# Altium PCB nguon.PcbDoc
Units mil, origin at the board's own origin, x right, y up, seen from the top; angles counter-clockwise.
Board outline 7517 x 10839 mil, 2 copper layers (Top Layer, Bottom Layer); 74 components, 22 nets, 172 pads, 8 vias.
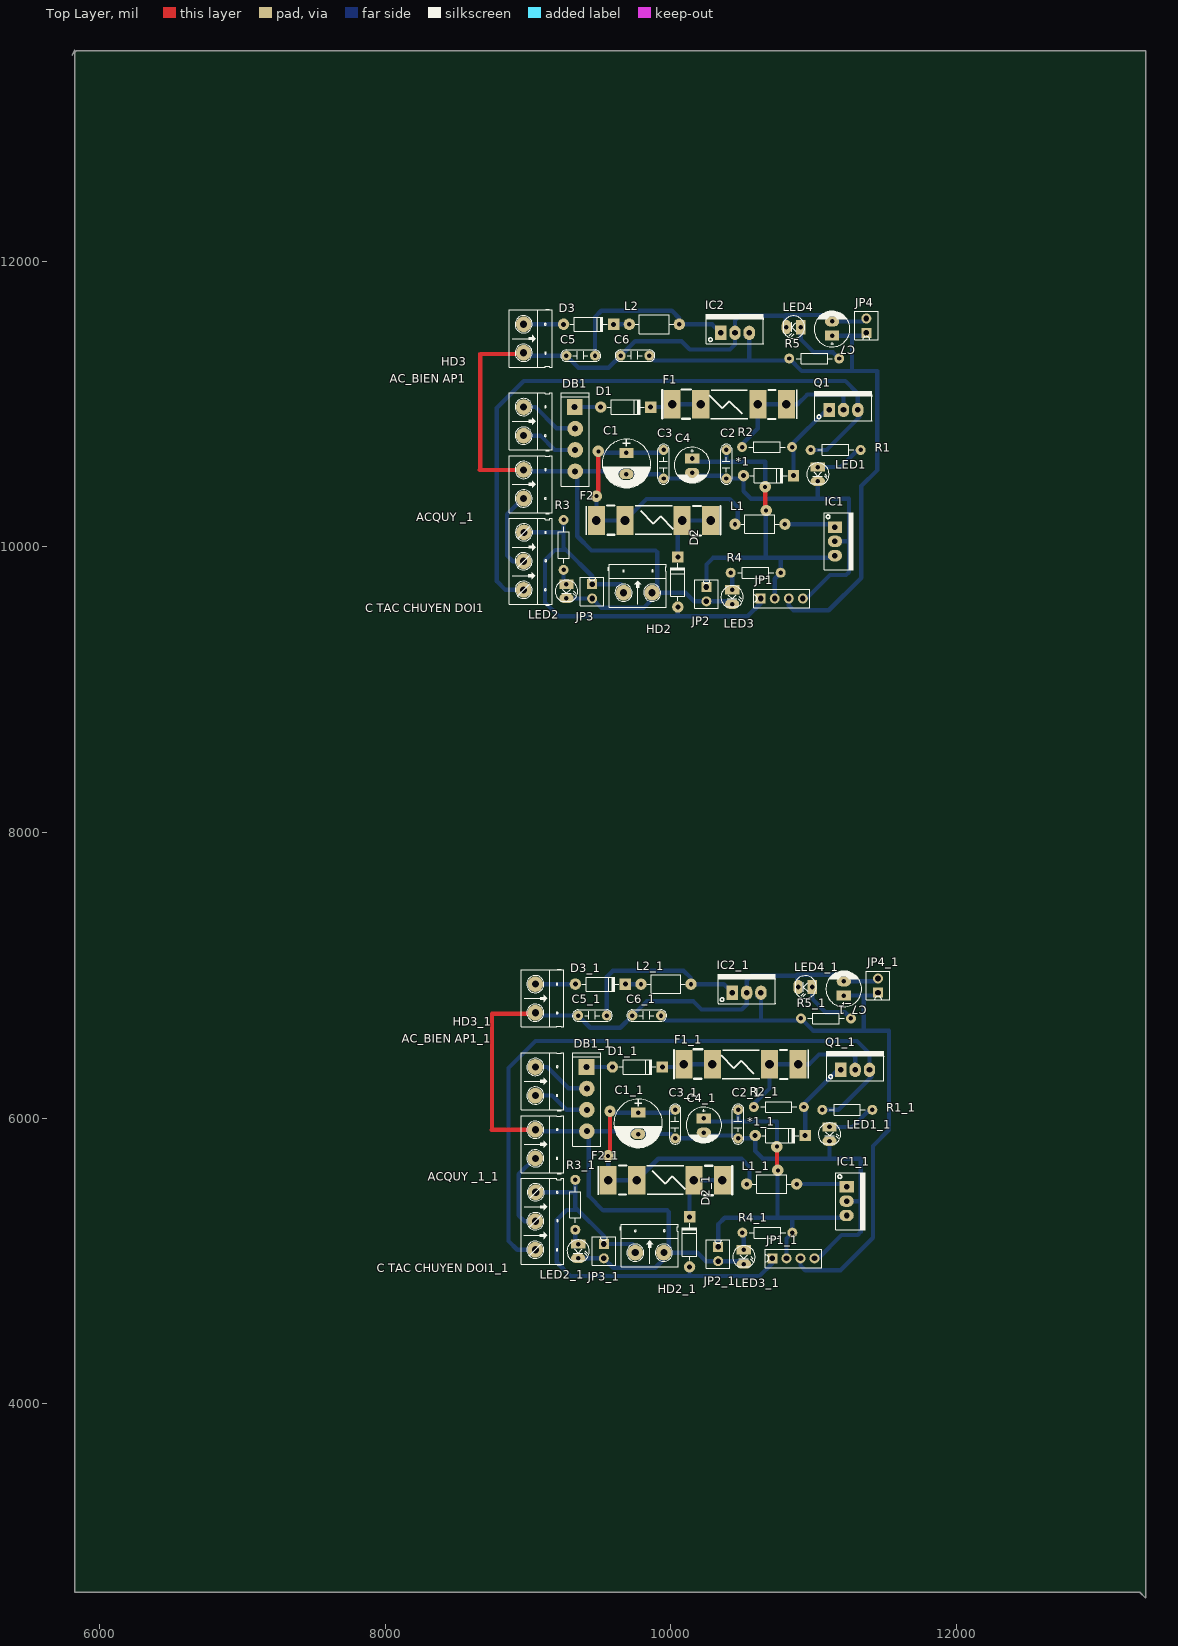
[diagram p0: Top Layer view]
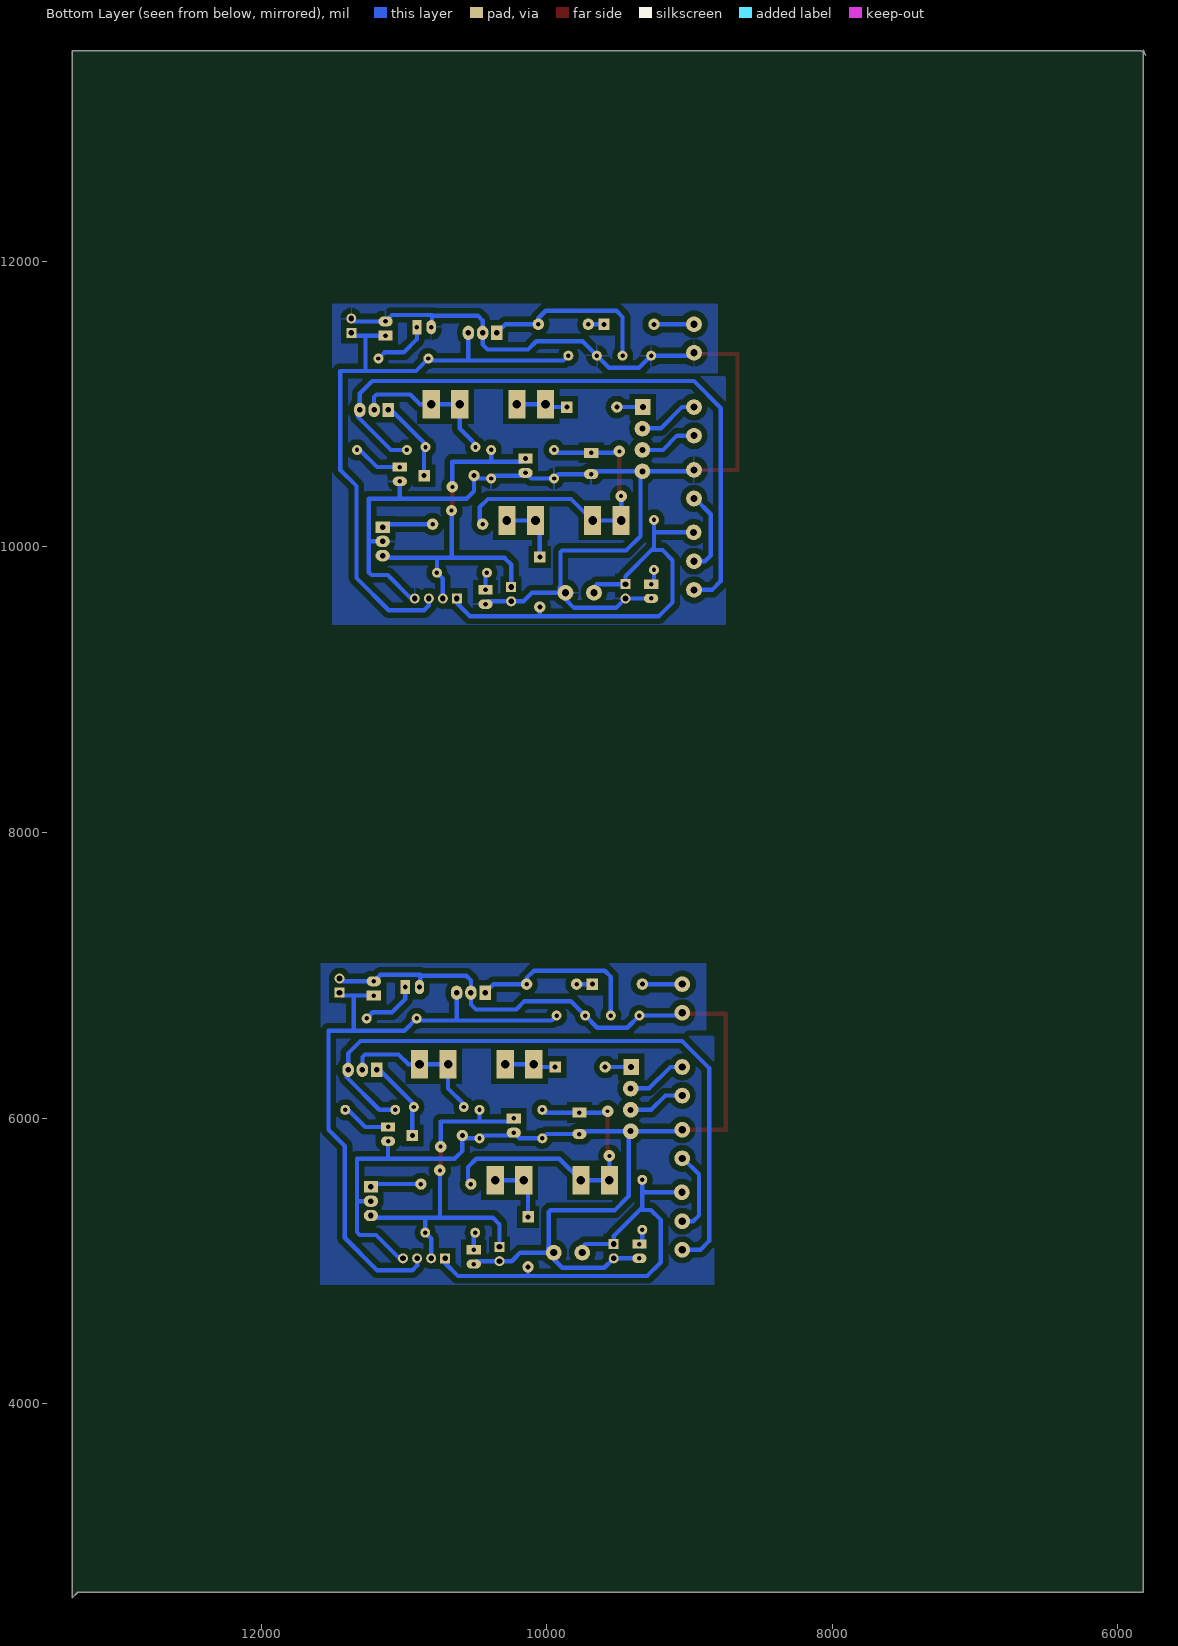
[diagram p1: Bottom Layer view, seen from below]
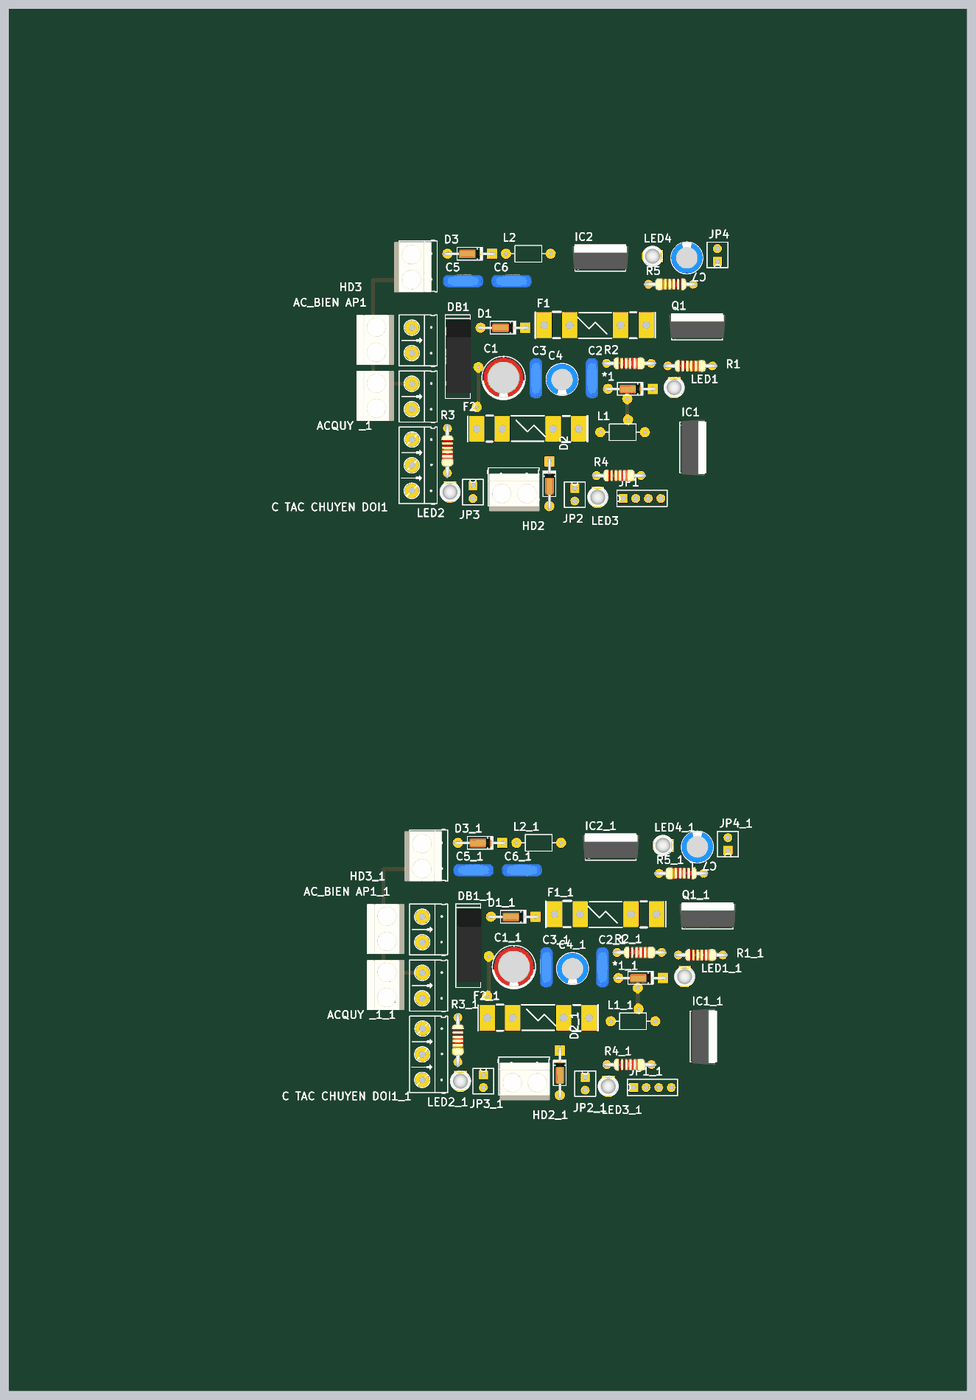
[diagram p2: 3D render of the assembled board from above, using the file's embedded part models]

## Layer stack, top to bottom
Top Layer: signal copper 1.4
Dielectric: dielectric 12.6, FR-4, Dk 4.8
Bottom Layer: signal copper 1.4

## Board outline
5806,13444 5835,13473 13323,13473 13323,2640 13283,2680 5823,2680 5823,13479

## Design rules (kind name [scope] priority, off if disabled: settings)
Clearance [All] p1: gap=40
FabricationTestpoint [(IsPad And (OnTopLayer Or OnBottomLayer))] p1: side=3 testpointundercomponent=TRUE minsize=40 maxsize=100 preferedsize=60 minholesize=0 maxholesize=40 preferedholesize=32 testpointgrid=1 allowsidetop=TRUE allowsidebottom=TRUE usegrid=TRUE gridtolerance=0.01
PolygonConnect [All] p1: connectstyle=Relief reliefconductorwidth=10 reliefentries=4 polygonreliefangle="90 Angle"
RoomDefinition nguon [InComponentClass('nguon')] p1: confinementstyle=ConfineIn formatcopy=TRUE lockcomponents=FALSE outline 7045,960 15880,960 15880,2030 7045,2030
RoutingVias [All] p1: holewidth=28 width=50 viastyle="Through Hole" minholewidth=28 minwidth=50 maxholewidth=28 maxwidth=50
SilkscreenOverComponentPads [All] p1: minsilkscreentomaskgap=10
SolderMaskExpansion [All] p1: expansion=4
Width [All] p1: maxlimit=30 minlimit=30 preferedwidth=30
26 further rules are at their usual default settings.

## Classes and differential pairs
component class nguon: 5V 12V 7805 7812 *1 "AC_BIEN AP" "AC_BIEN AP1" "ACQUY _1" "ACQUY _12V" C1 C2 C3 C4 C5 C6 C7 C8 C9 C10 C11 C12 "C TAC CHUYEN DOI" "C TAC CHUYEN DOI1" CAU_CL D1 D2 D3 D13 D14 DB1 F1 F2 HD2 HD3 IC1 IC2 JP1 JP2 JP3 JP4 L1 L2 LED1 LED2 LED3 LED4 "LED 5V" "LED 12V" Q1 R1 R2 R3 R4 R5 R22 R23 TP1

## Components (designator, comment, footprint, x,y, rotation, side; value= is the part's Value field where it differs from the comment)
*1 "Zener" D1A 10508,10499 r180 top
*1_1 "Zener" D1A 10590,5878 r180 top (schematic designator *1)
"AC_BIEN AP1" "Header 2" HED2 8968,10779 r90 top
"AC_BIEN AP1_1" "Header 2" HED2 9050,6158 r90 top (schematic designator "AC_BIEN AP1")
"ACQUY _1" "Header 2" HED2 8968,10339 r90 top
"ACQUY _1_1" "Header 2" HED2 9050,5718 r90 top (schematic designator "ACQUY _1")
C1 "1000uF" CP1.5/3.4 9688,10659 r270 top
C1_1 "1000uF" CP1.5/3.4 9770,6038 r270 top (schematic designator C1)
C2 "104" CN2 10388,10479 r90 top
C2_1 "104" CN2 10470,5858 r90 top (schematic designator C2)
C3 "104" CN2 9948,10479 r90 top
C3_1 "104" CN2 10030,5858 r90 top (schematic designator C3)
C4 "100uF" CP1/2.5 10148,10619 r270 top
C4_1 "100uF" CP1/2.5 10230,5998 r270 top (schematic designator C4)
C5 "104" CN2 9268,11339 r0 top
C5_1 "104" CN2 9350,6718 r0 top (schematic designator C5)
C6 "104" CN2 9648,11339 r0 top
C6_1 "104" CN2 9730,6718 r0 top (schematic designator C6)
C7 "100uF" CP1/2.5 11128,11479 r90 top
C7_1 "100uF" CP1/2.5 11210,6858 r90 top (schematic designator C7)
"C TAC CHUYEN DOI1" "Header 3" HED3 8968,9699 r90 top
"C TAC CHUYEN DOI1_1" "Header 3" HED3 9050,5078 r90 top (schematic designator "C TAC CHUYEN DOI1")
D1 "1N4007" D1A 9508,10979 r180 top
D1_1 "1N4007" D1A 9590,6358 r180 top (schematic designator D1)
D2 "1N4007" D1A 10048,9579 r270 top
D2_1 "1N4007" D1A 10130,4958 r270 top (schematic designator D2)
D3 "1N4007" D1A 9248,11559 r180 top
D3_1 "1N4007" D1A 9330,6938 r180 top (schematic designator D3)
DB1 "Diode Brideg" "CAU 1A" 9328,10979 r270 top
DB1_1 "Diode Brideg" "CAU 1A" 9410,6358 r270 top (schematic designator DB1)
F1 "F3A" Fuse 10408,10999 r0 top
F1_1 "F3A" Fuse 10490,6378 r0 top (schematic designator F1)
F2 "F1A" Fuse 9878,10185 r180 top
F2_1 "F1A" Fuse 9960,5564 r180 top (schematic designator F2)
HD2 "Header 2" HED2 9668,9679 r0 top
HD2_1 "Header 2" HED2 9750,5058 r0 top (schematic designator HD2)
HD3 "Header 2" HED2 8968,11559 r270 top
HD3_1 "Header 2" HED2 9050,6938 r270 top (schematic designator HD3)
IC1 "LM7805" QTO-220 11148,10139 r270 top
IC1_1 "LM7805" QTO-220 11230,5518 r270 top (schematic designator IC1)
IC2 "LM7805" QTO-220 10348,11499 r0 top
IC2_1 "LM7805" QTO-220 10430,6878 r0 top (schematic designator IC2)
JP1 "JP4" CON4 10628,9639 r90 top
JP1_1 "JP4" CON4 10710,5018 r90 top (schematic designator JP1)
JP2 "JP2" CON2#1 10248,9719 r0 top
JP2_1 "JP2" CON2#1 10330,5098 r0 top (schematic designator JP2)
JP3 "JP2" CON2#2 9448,9739 r180 top
JP3_1 "JP2" CON2#2 9530,5118 r180 top (schematic designator JP3)
JP4 "JP2" CON2#1 11368,11499 r180 top
JP4_1 "JP2" CON2#1 11450,6878 r180 top (schematic designator JP4)
L1 "100uH" L/0.4 10448,10159 r0 top
L1_1 "100uH" L/0.4 10530,5538 r0 top (schematic designator L1)
L2 "100uH" L/0.4 9708,11559 r0 top
L2_1 "100uH" L/0.4 9790,6938 r0 top (schematic designator L2)
LED1 "LED" LED-3 11028,10559 r270 top
LED1_1 "LED" LED-3 11110,5938 r270 top (schematic designator LED1)
LED2 "LED" LED-3 9268,9739 r270 top
LED2_1 "LED" LED-3 9350,5118 r270 top (schematic designator LED2)
LED3 "LED" LED-3 10428,9699 r270 top
LED3_1 "LED" LED-3 10510,5078 r270 top (schematic designator LED3)
LED4 "LED" LED-3 10908,11539 r180 top
LED4_1 "LED" LED-3 10990,6918 r180 top (schematic designator LED4)
Q1 "TIP41C" QTO-220 11108,10959 r0 top
Q1_1 "TIP41C" QTO-220 11190,6338 r0 top (schematic designator Q1)
R1 "1k" R1/4W 11328,10679 r180 top
R1_1 "1k" R1/4W 11410,6058 r180 top (schematic designator R1)
R2 "1k" R1/4W 10848,10699 r180 top
R2_1 "1k" R1/4W 10930,6078 r180 top (schematic designator R2)
R3 "1k" R1/4W 9248,9839 r90 top
R3_1 "1k" R1/4W 9330,5218 r90 top (schematic designator R3)
R4 "1k" R1/4W 10768,9819 r180 top
R4_1 "1k" R1/4W 10850,5198 r180 top (schematic designator R4)
R5 "330" R1/4W 10828,11319 r0 top
R5_1 "330" R1/4W 10910,6698 r0 top (schematic designator R5)

## Footprints (in the part's own frame and the unit in brackets; to place one, negate y for a bottom-side part, rotate by r counter-clockwise, add the part's x,y. Pads: shape width x height; smd on the part's side, far side on the other; paste and mask are expansions set on the pad)
"CAU 1A" [mil] "CAU 1A DET"
  rect 110x110 hole 42: 1(0,-2)
  round 110 hole 42: 2(151,1) 3(300,1) 4(450,1)
  silkscreen extent -101,-97 555,99, body extent -62,-90 512,107, height 453
CN2 [mil]
  round 70 hole 31: 1(0,0) 2(200,0)
  silkscreen extent -40,-40 240,40, body extent -54,-44 260,55, height 407
CON2#1 [mil]
  rect 70x70 hole 39.37 unplated: 1(0,0)
  round 70 hole 39.37 unplated: 2(0,-100)
  silkscreen extent -82,-150 82,50
CON2#2 [mil]
  rect 70x70 hole 39.37 unplated: 1(0,0)
  round 70 hole 39.37 unplated: 2(0,100)
  silkscreen extent -82,-50 82,150
CON4 [mil]
  rect 70x70 hole 39.37 unplated: 1(0,0)
  round 70 hole 39.37 unplated: 2(0,-98.43) 3(0,-196.85) 4(0,-295.28)
  silkscreen extent -64,-344 64,49
CP1.5/3.4 [mil] "Tu hoa 220->470uF,16V, 470uF/16V,25V"
  rect 70x100 hole 32: 1(0,0)
  oval 70x100 hole 32: 2(150,0)
  silkscreen extent -95,-170 245,170, body extent -85,-157 230,157, height 446
CP1/2.5 [mil] "Tu hoa 33 >100 uF,50V, 220uF/16V,25V"
  rect 70x100 hole 32: 1(0,0)
  oval 70x100 hole 32: 2(100,0)
  silkscreen extent -78,-125 172,125, body extent -76,-124 172,124, height 422
D1A [mil] "Diode 1A, W 100mil, L 350mil"
  round 80 hole 35: 1(0,0)
  rect 80x80 hole 35: 2(-350,0)
  silkscreen extent -305,-50 -45,50, body extent -386,-33 34,36, height 84
Fuse [mil] "3A"
  rect 120x200 hole 60: 1(-400,0) 1(-200,0) 2(200,0) 2(400,0)
  silkscreen extent -469,-104 471,104, body extent -335,-100 335,105, height 100
HED2 [mil] "Header 2, 2 pin, hight 300mil, Pin to Pin 200, Colour Green"
  round 110 hole 50: 1(0,0) 2(200,0)
  silkscreen extent -106,-200 300,100, body extent -92,140 302,435, height 394
HED3 [mil] "Header 3, 3 pin, hight 300mil, Pin to Pin 200, Colour Green"
  round 110 hole 50: 1(0,0) 2(200,0) 3(402.62,-2.62)
  silkscreen extent -106,-200 500,100
L/0.4 [mil] "Inductor , 2 Pin, L 350mil, W 150 mil"
  round 80 hole 31: 1(0,0) 2(350,0)
  silkscreen extent 40,-65 310,65
LED-3 [mil] "LED 2 PIN, 3ly Only colour"
  rect 65x100 hole 32: 1(0,0)
  oval 65x100 hole 32: 2(100,0)
  silkscreen extent -29,-78 118,79, body extent -13,-75 125,75, height 217
QTO-220 [mil] "TO-220 - 1-2-3"
  rect 80x100 hole 39: 1(0,0)
  oval 80x100 hole 39: 2(100,0) 3(200,0)
  silkscreen extent -100,-76 300,130, body extent -119,-64 322,121, height 755
R1/4W [mil] "R 1/4W, 2 Pin, 350mil"
  round 70 hole 31: 1(0,0) 2(350,0)
  silkscreen extent 48,-38 302,38, body extent -40,-47 386,47, height 111

## Part data
"AC_BIEN AP1" "AC_BIEN AP1_1" "ACQUY _1" "ACQUY _1_1" HD2 HD2_1 HD3 HD3_1: library part Hed2, "Header 2 (Green)"
C1 C1_1: library part CP4, "Cap 1000uF/16V - 220uF/50V"
C2 C2_1 C3 C3_1 C5 C5_1 C6 C6_1: library part CN2, "Cap np 104 => 105pF"
C4 C4_1 C7 C7_1: library part CP2, "C 47uF/50V , 220uF/16V"
"C TAC CHUYEN DOI1" "C TAC CHUYEN DOI1_1": library part Hed3, "Header 3 (Green)"
D1 D1_1 D2 D2_1 D3 D3_1: library part D1A, "Diode 1A"
DB1 DB1_1: library part DB, "Convert AC to DC voltage, 4 pin"
F1 F1_1 F2 F2_1: library part Fuse, "Fuse"
IC1 IC1_1 IC2 IC2_1: library part LM78xx, "On ap +, from + 5 to + 24VDC"
JP1 JP1_1: library part Con4, "Connector 4"
JP2 JP2_1 JP3 JP3_1 JP4 JP4_1: library part Con2, "Connector 2"
L1 L1_1 L2 L2_1: library part L1, "Inductor"
LED1 LED1_1 LED2 LED2_1 LED3 LED3_1 LED4 LED4_1: "LED Single colour Green and Red"
Q1 Q1_1: "NPN 2W, BCE"
R1 R1_1 R2 R2_1 R3 R3_1 R4 R4_1 R5 R5_1: library part R1/4W, "Resistor 1/4W"

## Via types
v1: diameter 80, hole 28, Top Layer to Bottom Layer, 8 vias

## Nets (pads, with @x,y where several pads share a name; then routed paths per layer and width w, separated by ;. In a path a pad name is that pad's centre, name@x,y a point inside that pad or via, vN(x,y) a via of type N, cw(c..) or ccw(c..) an arc to the next point about the centre after c; other vN are vias at no path point)
0V: "ACQUY _1.2" *1.1 C1.2 C2.1 C3.1 C4.2 C5.1 C6.1 C7.2 DB1.4 HD2.2 HD3.2 IC1.2 IC2.2 JP1.4 JP2.2 JP3.2 JP4.2 LED1.2 LED2.2 LED3.2 LED4.2 | length 10607.7
  Top Layer w30: HD3.2@8960,11351 8664,11351 8664,10542 8661,10539 8968,10539
  Bottom Layer w30: 8968,10539 8978,10529 DB1.4 ; HD3.2 8988,11339 C5.1 9353,11254 9563,11254 C6.1 9749,11440 10073,11440 10131,11382 10413,11382 10448,11417 IC2.2 10448,11585 10481,11618 10796,11618 10802,11624 ; LED2.2 JP3.2 9514,9573 9808,9573 9868,9633 HD2.2 10102,9679 10162,9619 JP2.2 10408,9619 LED3.2 ; HD2.2@9908,9679 9908,9719 9903,9724 9903,9964 9892,9975 9443,9975 9343,10075 9343,10529 9668,10529 C1.2 9918,10509 C3.1 10108,10479 C4.2 ; C4.2@10148,10499 10368,10499 C2.1 ; C2.1@10368,10479 C2.1 ; *1.1@10508,10479 10508,10390 10561,10337 11038,10337 ; *1.1 10488,10479 C2.1 ; LED4.2 10802,11545 10802,11624 ; JP1.4 10949,9639 11113,9803 11226,9803 11246,9823 11246,10031 11246,10337 11038,10337 ; 11028,10385 LED1.2 ; LED1.2@11041,10446 LED1.2 ; IC1.2@11169,10039 IC1.2 11238,10039 ; JP4.2 11348,11579 C7.2 11083,11624 10802,11624 ; LED1.2 11028,10347 11038,10337
5V: C2.2 C4.1 IC1.3 JP1.2 JP2.1 R4.1 | length 2752
  Top Layer w30: v1(10660,10421) 10660,10261 v1(10666,10255)
  Bottom Layer w30: C4.1@10128,10599 C4.1@10148,10599 ; C4.1 10170,10597 10387,10597 ; JP2.1 10248,9877 10294,9923 10664,9923 ; 10388,10624 C2.2 10388,10598 10387,10597 ; v1@10657,10410 10660,10413 v1(10660,10421) 10660,10597 10387,10597 ; v1(10666,10255) 10664,10253 10664,9923 ; JP1.2 10726.43,9777.43 R4.1 10768,9922 ; IC1.3 11132,9923 10664,9923
12V: "C TAC CHUYEN DOI1.3" D2.1 HD2.1 JP1.1 JP3.1 R3.2 | length 3254.1
  Bottom Layer w30: 8970.62,10101.62 9248,10101.62 ; R3.2 9248,10101.62 ; HD2.1@9708,9679 9648,9739 JP3.1 9448,9795 9265.5,9977.5 ; D2.1 10048,9518 10045,9515 ; JP1.1 10628,9605 10538,9515 10045,9515 ; 9248,10101.62 9248,9995 9265.5,9977.5 ; 9265.5,9977.5 9188.5,9977.5 9118,9907 9118,9611 9214,9515 10045,9515
Net*1_2: *1.2 Q1.1 R2.1 | length 603.6
  Bottom Layer w30: *1.2@10858,10479 10858,10709 10848,10719 11088,10959 Q1.1
"NetAC_BIEN AP1_1": "AC_BIEN AP1.1" DB1.3 | length 402.4
  Bottom Layer w30: 8968,10779 9086,10779 9186,10679 DB1.3
"NetAC_BIEN AP1_2": "AC_BIEN AP1.2" DB1.2 | length 423.5
  Bottom Layer w30: 8968,10979 9051,10979 9199,10831 9326,10831 DB1.2
"NetACQUY _1_1": "ACQUY _1.1" "C TAC CHUYEN DOI1.2" | length 585
  Bottom Layer w30: 8968,9899 8892,9899 8851,9940 8851,10228 8962,10339 8968,10339
NetC1_1: C1.1 C3.2 F2.2 L1.1 | length 2208.5
  Top Layer w30: v1(9478,10356) 9491,10369 v1(9491,10669)
  Bottom Layer w30: v1(9478,10356) 9478,10185 9678,10185 9829,10336 10411,10336 10468,10279 10468,10179 L1.1 ; v1@9482,10658 9483,10659 C1.1 ; C1.1@9648,10659 C1.1 ; C3.2 9928,10659 C1.1
NetC5_2: C5.2 IC2.1 L2.2 | length 1257.2
  Bottom Layer w30: C5.2 9468,11610 9511,11653 10006,11653 10058,11601 L2.2 10288,11559 IC2.1
"NetC TAC CHUYEN DOI1_1": "C TAC CHUYEN DOI1.1" Q1.3 R1.2 | length 4674.8
  Bottom Layer w30: 8968,9699 8841,9699 8780,9760 8780,10972 8969,11161 11221,11161 11308,11074 Q1.3 11308,10921 11320,10909 11090,10679 R1.2
NetD1_1: D1.1 DB1.1 | length 182
  Bottom Layer w30: DB1.1 D1.1
NetD1_2: D1.2 F1.1 | length 358.3
  Bottom Layer w30: D1.2 9988,10979 10008,10999 F1.1@10208,10999
NetD2_2: D2.2 F2.1 | length 468.4
  Bottom Layer w30: D2.2 10048,10155 10078,10185 F2.1@10278,10185
NetD3_1: D3.1 HD3.1 | length 280
  Bottom Layer w30: HD3.1 D3.1
NetD3_2: D3.2 L2.1 | length 110
  Bottom Layer w30: D3.2 L2.1
NetF1_2: F1.2 Q1.2 R2.2 | length 1051.2
  Bottom Layer w30: R2.2@10498,10719 10608,10829 10608,10999 10808,10999 10887,10999 10955,11067 11190,11067 11208,11049 Q1.2
NetIC1_1: IC1.1 L1.2 | length 354.7
  Bottom Layer w30: L1.2 L1.2@10818,10159 ; L1.2@10798,10179 L1.2@10818,10159 ; IC1.1@11119,10146 11106,10159 L1.2@10818,10159
NetLED1_1: LED1.1 R1.1 | length 349.7
  Bottom Layer w30: LED1.1 11188,10559 11308,10679 R1.1
NetLED2_1: LED2.1 R3.1 | length 120
  Bottom Layer w30: LED2.1@9248,9719 R3.1
NetLED3_1: LED3.1 R4.2 | length 124.1
  Bottom Layer w30: R4.2 10428,9809 LED3.1
NetLED4_1: LED4.1 R5.2 | length 410.3
  Bottom Layer w30: LED4.1 10908,11455 11001,11362 11135,11362 R5.2
VCC: C6.2 C7.1 IC2.3 JP1.3 JP4.1 R5.1 | length 4616.4
  Bottom Layer w30: C6.2 9882,11305 10557,11305 ; IC2.3@10523,11474 IC2.3 10548,11314 10557,11305 ; JP1.3 10824.85,9638.43 10824.85,9589.15 10858,9556 11105,9556 11332,9783 11332,10426 11445,10539 11445,11232 11270,11232 ; R5.1@10828,11299 10822,11305 10557,11305 ; R5.1 10915,11232 11237,11232 11270,11232 ; C7.1 11268,11479 ; 11268,11253 11268,11288 ; 11312,11232 11270,11232 ; JP4.1 11348,11479 11268,11479 ; 11268,11288 11268,11479 ; 11268,11288 11268,11234 11270,11232
pads on no net: "AC_BIEN AP1_1.1" "AC_BIEN AP1_1.2" "ACQUY _1_1.1" "ACQUY _1_1.2" "C TAC CHUYEN DOI1_1.1" "C TAC CHUYEN DOI1_1.2" "C TAC CHUYEN DOI1_1.3" *1_1.1 *1_1.2 C1_1.1 C1_1.2 C2_1.1 C2_1.2 C3_1.1 C3_1.2 C4_1.1 C4_1.2 C5_1.1 C5_1.2 C6_1.1 C6_1.2 C7_1.1 C7_1.2 D1_1.1 D1_1.2 D2_1.1 D2_1.2 D3_1.1 D3_1.2 DB1_1.1 DB1_1.2 DB1_1.3 DB1_1.4 F1_1.1 F1_1.2 F2_1.1 F2_1.2 HD2_1.1 HD2_1.2 HD3_1.1 HD3_1.2 IC1_1.1 IC1_1.2 IC1_1.3 IC2_1.1 IC2_1.2 IC2_1.3 JP1_1.1 JP1_1.2 JP1_1.3 JP1_1.4 JP2_1.1 JP2_1.2 JP3_1.1 JP3_1.2 JP4_1.1 JP4_1.2 L1_1.1 L1_1.2 L2_1.1 L2_1.2 LED1_1.1 LED1_1.2 LED2_1.1 LED2_1.2 LED3_1.1 LED3_1.2 LED4_1.1 LED4_1.2 Q1_1.1 Q1_1.2 Q1_1.3 R1_1.1 R1_1.2 R2_1.1 R2_1.2 R3_1.1 R3_1.2 R4_1.1 R4_1.2 R5_1.1 R5_1.2
copper on no net: | length 35193.9
  Top Layer w30: 9042,6730 8746,6730 8746,5921 8743,5918 9050,5918 ; v1(9560,5735) 9573,5748 v1(9573,6048) ; v1(10742,5800) 10742,5640 v1(10748,5634)
  Bottom Layer w30: 9050,5078 8923,5078 8862,5139 8862,6351 9051,6540 11303,6540 11390,6453 11390,6338 11390,6300 11402,6288 11172,6058 11060,6058 ; 9050,5278 8974,5278 8933,5319 8933,5607 9044,5718 9050,5718 ; 9050,5918 9060,5908 9411,5908 ; 9050,6158 9168,6158 9268,6058 9411,6058 ; 9050,6358 9133,6358 9281,6210 9408,6210 9411,6207 ; 9050,6738 9070,6718 9350,6718 9435,6633 9645,6633 9730,6718 9831,6819 10155,6819 10213,6761 10495,6761 10530,6796 10530,6878 10530,6964 10563,6997 10878,6997 10884,7003 ; 9050,6938 9330,6938 ; 9052.62,5480.62 9330,5480.62 ; 9330,5098 9330,5218 ; 9330,5568 9330,5480.62 ; 9350,5018 9530,5018 9596,4952 9890,4952 9950,5012 9950,5058 10184,5058 10244,4998 10330,4998 10490,4998 10510,4978 ; 9408,6358 9590,6358 ; 9550,6718 9550,6989 9593,7032 10088,7032 10140,6980 10140,6938 10370,6938 10430,6878 ; v1(9560,5735) 9560,5564 9760,5564 9911,5715 10493,5715 10550,5658 10550,5558 10530,5538 ; v1@9564,6037 9565,6038 9770,6038 ; 9680,6938 9790,6938 ; 9730,6038 9770,6038 ; 9790,5058 9730,5118 9530,5118 9530,5174 9347.5,5356.5 ; 9930,6718 9964,6684 10639,6684 ; 9940,6358 10070,6358 10090,6378 10290,6378 ; 9990,5058 9990,5098 9985,5103 9985,5343 9974,5354 9525,5354 9425,5454 9425,5908 9750,5908 9770,5888 10000,5888 10030,5858 10190,5858 10230,5898 ; 10030,6058 10010,6038 9770,6038 ; 10130,4958 10130,4897 10127,4894 ; 10130,5308 10130,5534 10160,5564 10360,5564 ; 10210,5978 10230,5978 ; 10230,5878 10450,5878 10470,5858 ; 10230,5998 10252,5976 10469,5976 ; 10330,5098 10330,5256 10376,5302 10746,5302 ; 10450,5858 10470,5858 ; 10470,6003 10470,6058 10470,5977 10469,5976 ; 10500,5198 10510,5188 10510,5078 ; 10580,6098 10690,6208 10690,6378 10890,6378 10969,6378 11037,6446 11272,6446 11290,6428 11290,6338 ; 10590,5858 10590,5769 10643,5716 11120,5716 ; 10590,5878 10570,5858 10470,5858 ; 10605,6853 10630,6878 10630,6693 10639,6684 ; 10710,5018 10710,4984 10620,4894 10127,4894 ; v1@10739,5789 10742,5792 v1(10742,5800) 10742,5976 10469,5976 ; v1(10748,5634) 10746,5632 10746,5302 ; 10808.43,5018 10808.43,5156.43 10850,5198 10850,5301 ; 10880,5538 10900,5538 ; 10880,5558 10900,5538 ; 10890,6918 10884,6924 10884,7003 ; 10906.85,5018 10906.85,5017.43 10906.85,4968.15 10940,4935 11187,4935 11414,5162 11414,5805 11527,5918 11527,6611 11352,6611 ; 10910,6678 10904,6684 10639,6684 ; 10910,6698 10997,6611 11319,6611 11352,6611 ; 10940,5858 10940,6088 10930,6098 11170,6338 11190,6338 ; 10990,6918 10990,6834 11083,6741 11217,6741 11260,6698 ; 11005.28,5018 11031,5018 11195,5182 11308,5182 11328,5202 11328,5410 11328,5716 11120,5716 ; 11110,5764 11110,5838 ; 11110,5938 11270,5938 11390,6058 11410,6058 ; 11123,5825 11110,5838 ; 11201,5525 11188,5538 10900,5538 ; 11210,6858 11350,6858 ; 11230,5318 11214,5302 10746,5302 ; 11251,5418 11230,5418 11320,5418 ; 11350,6632 11350,6667 ; 11394,6611 11352,6611 ; 11450,6878 11430,6858 11350,6858 ; 11450,6978 11430,6958 11210,6958 11165,7003 10884,7003 ; 9330,5480.62 9330,5374 9347.5,5356.5 ; 9347.5,5356.5 9270.5,5356.5 9200,5286 9200,4990 9296,4894 10127,4894 ; 11110,5838 11110,5726 11120,5716 ; 11350,6667 11350,6613 11352,6611 ; 11350,6667 11350,6858

## Polygon pours and split planes (outlines as drawn)
no net on Bottom Layer "Bottom Layer-No Net" (solid, pour order 1001): 8883,7079 8887,7083 11582,7083 11582,6603 11574,6595 8883,6595 8883,7079
no net on Bottom Layer "Bottom Layer-No Net" (solid, pour order 1000): 8832,6570 8837,6575 11584,6575 11584,4843 11589,4838 11584,4833 8827,4833 8827,6575 8822,6580
0V on Bottom Layer "Bottom Layer-No Net" (solid, pour order 1000): 8750,11191 8755,11196 11502,11196 11502,9464 11507,9459 11502,9454 8745,9454 8745,11196 8740,11201
0V on Bottom Layer "Bottom Layer-No Net" (solid, pour order 1001): 8801,11700 8805,11704 11500,11704 11500,11224 11492,11216 8801,11216 8801,11700